# Altium PCB pcbMapaSensorChassi.PcbDoc
Units mm, origin at the board's own origin, x right, y up, seen from the top; angles counter-clockwise.
Board outline 93.5 x 57.5 mm, 2 copper layers (Top Layer, Bottom Layer); 26 components, 31 nets, 128 pads, 19 vias.
Unrouted connection lines stored in the file: 23.
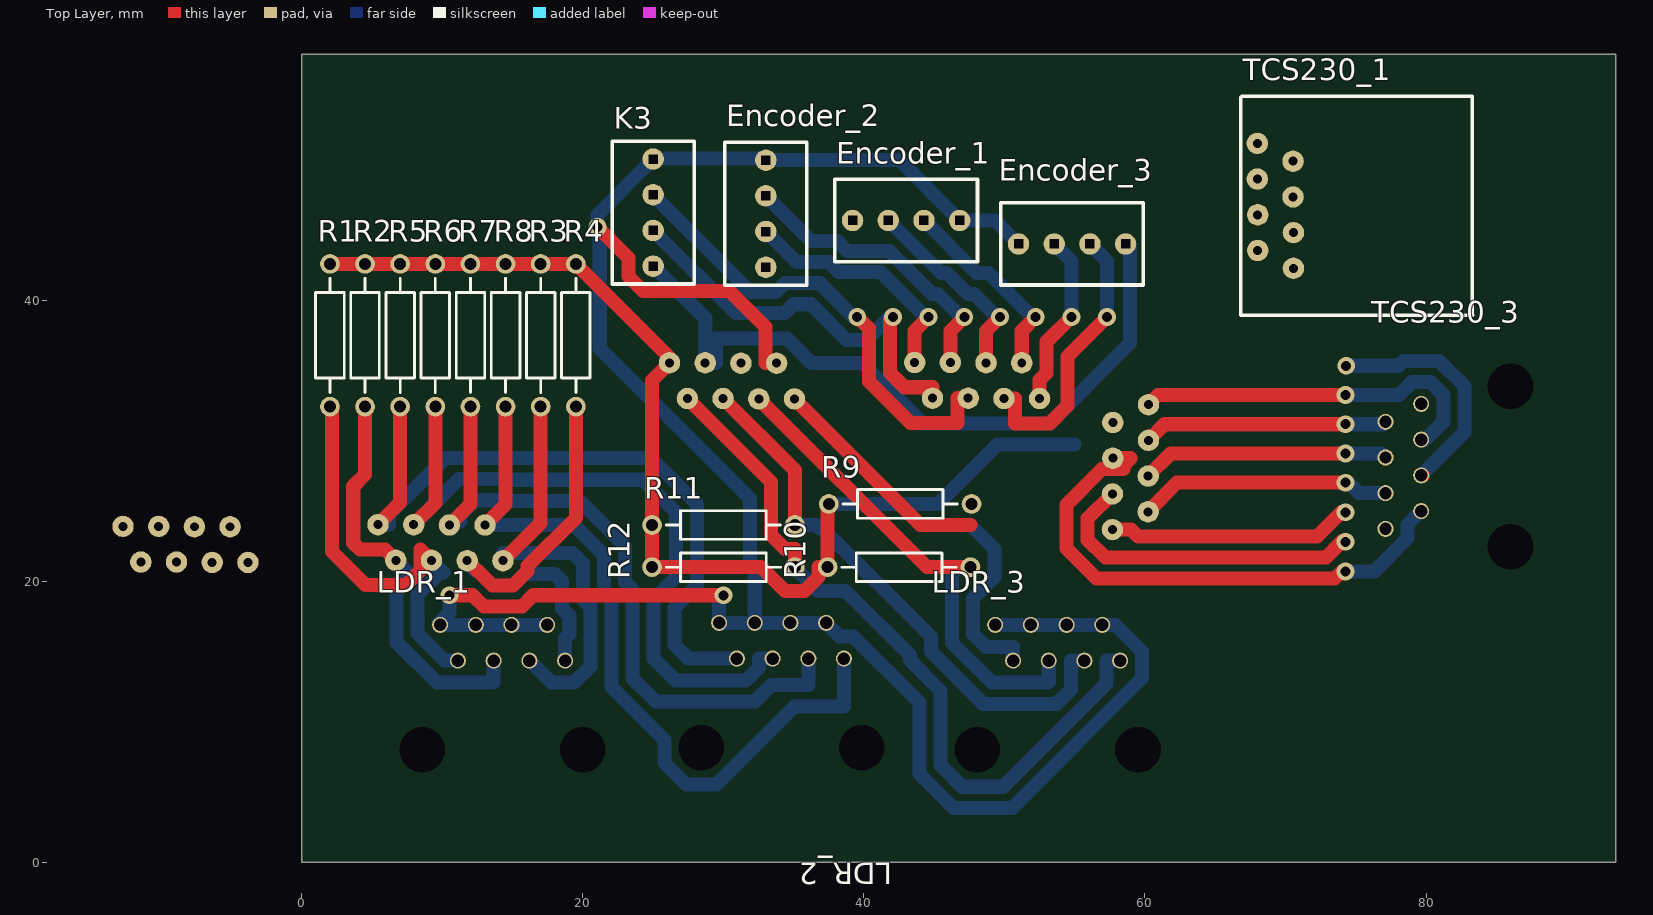
[diagram p0: Top Layer view]
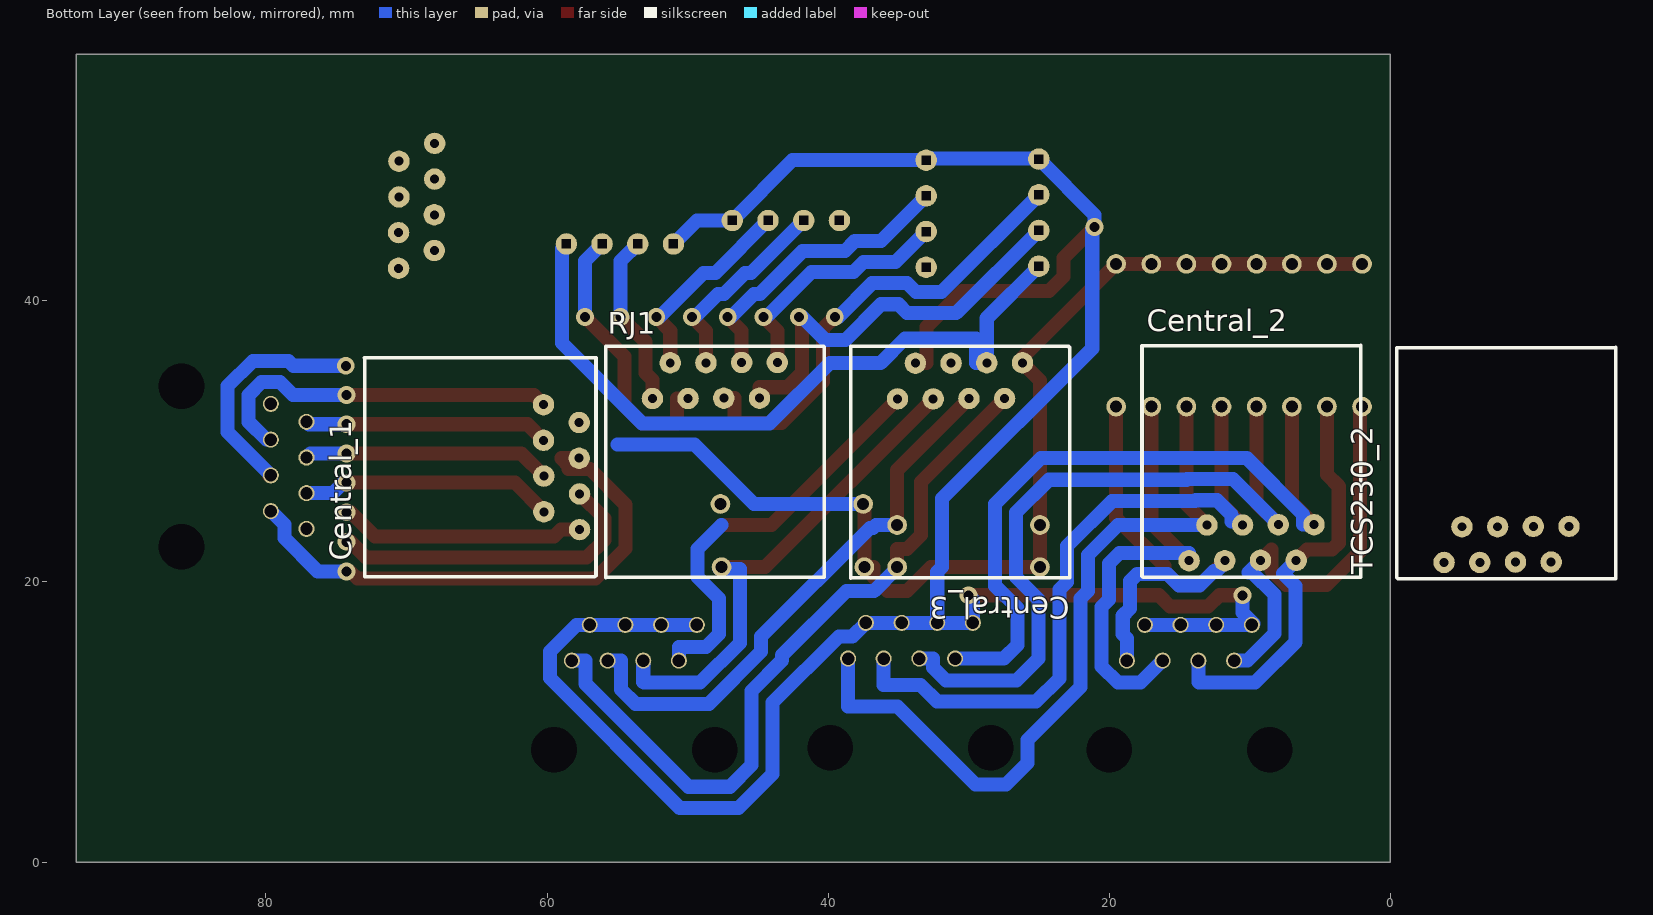
[diagram p1: Bottom Layer view, seen from below]
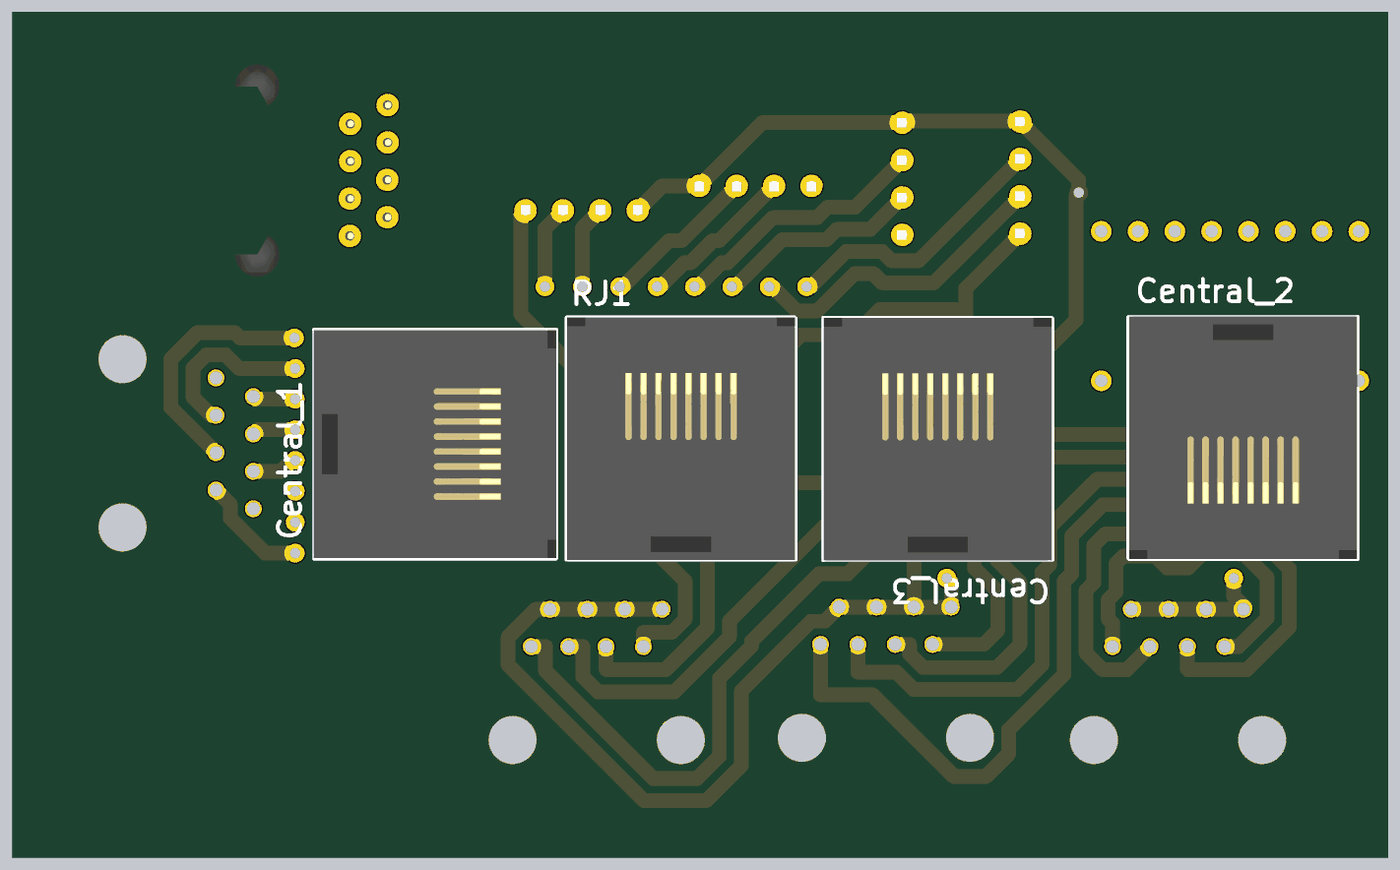
[diagram p2: 3D render of the assembled board from below, using the file's embedded part models]

## Layer stack, top to bottom
Top Solder: solder mask 0.0102, Solder Resist, Dk 3.5
Top Layer: signal copper 0.0356
Dielectric 1: dielectric 0.32, FR-4, Dk 4.8
Bottom Layer: signal copper 0.0356
Bottom Solder: solder mask 0.0102, Solder Resist, Dk 3.5

## Board outline
0,0 93.5,0 93.5,57.5 0,57.5

## Design rules (kind name [scope] priority, off if disabled: settings)
Clearance [All] p1: gap=0.5 ignorepadtopadclearanceinfootprint=FALSE
PolygonConnect [All] p1: connectstyle=Relief reliefconductorwidth=0.254 reliefentries=4 polygonreliefangle="90 Angle" airgapwidth=0.254
RoomDefinition Open_sch [InComponentClass('Open_sch')] p1: confinementstyle=ConfineIn formatcopy=TRUE lockcomponents=FALSE outline 0,0 4,0 4,5.5 0,5.5
RoutingVias [All] p1: holewidth=0.711 width=1.27 viastyle="Through Hole" minholewidth=0.64 minwidth=1.27 maxholewidth=1 maxwidth=1.5
SolderMaskExpansion [All] p1: expansion=0.102
Width [All] p1: maxlimit=3 minlimit=0.5 preferedwidth=1 minimp=50.000000 maximp=50.000000 favimp=50.000000
30 further rules are at their usual default settings.

## Classes and differential pairs
component class Open_sch: Central_2 Central_3 Encoder_1 Encoder_2 Encoder_3 K3 LDR_1 LDR_2 LDR_3 R1 R2 R3 R4 R5 R6 R7 R8 R9 R10 R11 R12 TCS230_2 TCS230_3

## Components (designator, comment, footprint, x,y, rotation, side; value= is the part's Value field where it differs from the comment)
Central_1 "RJ45" RJ45_90#1 60.249,32.563 r270 bottom
Central_2 "RJ45" RJ45_90#1 5.42,24.025 r0 bottom
Central_3 "RJ45" RJ45_90#1 35.056,32.975 r180 bottom
Encoder_1 "Encoder1" 4-vias 39.192,45.669 r90 top
Encoder_2 "Encoder_2" 4-vias 33.02,42.342 r180 top
Encoder_3 "Encoder_3" 4-vias 58.62,44 r270 top
K3 "Encoder_4" 4-vias 25,42.42 r180 top
LDR_1 "RJ45" RJ45_Simples 8.57,8 r0 top
LDR_2 "RJ45" RJ45_Simples 28.42,8.15 r0 top
LDR_3 "RJ45" RJ45_Simples 48.07,8 r0 top
R1 "Res2" AXIAL-0.4 2,37.5 r90 top value=1K
R2 "Res2" AXIAL-0.4 4.5,37.5 r90 top value=1K
R3 "Res2" AXIAL-0.4 17,37.5 r90 top value=1K
R4 "Res2" AXIAL-0.4 19.5,37.5 r90 top value=1K
R5 "Res2" AXIAL-0.4 7,37.5 r90 top value=1K
R6 "Res2" AXIAL-0.4 9.5,37.5 r90 top value=1K
R7 "Res2" AXIAL-0.4 12,37.5 r90 top value=1K
R8 "Res2" AXIAL-0.4 14.5,37.5 r90 top value=1K
R9 "Res2" AXIAL-0.4 42.58,25.5 r180 top value=1K
R10 "Res2" AXIAL-0.4 42.5,21 r180 top value=1K
R11 "Res2" AXIAL-0.4 30,24 r180 top value=1K
R12 "Res2" AXIAL-0.4 30,21 r180 top value=1K
RJ1 "RJ45" RJ45_90#1 52.5,33 r180 bottom
TCS230_1 "RJ45" RJ45_90#1 70.561,42.266 r90 top
TCS230_2 "RJ45" RJ45_90#2 -12.725,23.901 r0 bottom
TCS230_3 "RJ45" RJ45_Simples 86.004,22.454 r90 top

## Footprints (in the part's own frame and the unit in brackets; to place one, negate y for a bottom-side part, rotate by r counter-clockwise, add the part's x,y. Pads: shape width x height; smd on the part's side, far side on the other; paste and mask are expansions set on the pad)
4-vias [mil]
  round 60 hole 25.2 square: 1(0,0) 2(0,-100) 3(0,-200) 4(0,-300)
  silkscreen extent -115,-350 115,50, body extent -115,-350 115,50, height 460
AXIAL-0.4 [mm] "Axial Device, Thru-Hole; 2 Leads; 0.4 in Pin Spacing"
  round 1.4 hole 0.85: 1(-5.08,0) 2(5.08,0)
  silkscreen extent -4.06,-1.02 4.06,1.02
RJ45_90#1 [mil]
  round 60 hole 25.2: 1(50,100) 2(150,100) 3(250,101) 4(350,101) 5(0,0) 6(100,0) 7(200,1) 8(300,1)
  silkscreen extent -131,-502 482,147, body extent -130,-503 480,147, height 630
RJ45_90#2 [mil]
  round 60 hole 25.2: 1(300,1) 2(350,101) 3(200,1) 4(250,101) 5(100,0) 6(150,100) 7(0,0) 8(50,100)
  silkscreen extent -131,-502 482,147, body extent -130,-503 480,147, height 630
RJ45_Simples [mil] "Sem led nessas porra - 8P8C"
  round 0 hole 128: 0(0,0) 0(450,0)
  round 45 hole 35: 1(400,250) 2(350,350) 3(300,250) 4(250,350) 5(200,250) 6(150,350) 7(100,250) 8(50,350)
  body extent -133,-260 583,395, height 650

## Part data
Encoder_1 Encoder_2 Encoder_3 K3: library part KK4Vias, ComponentLink1Description=Fabricante, ComponentLink1URL=https://www.molex.com/molex/products/family?key=kk_254_rpc_connector_system&channel=products&chanName=family&pageTitle=Introduction&parentKey=kk_interconnect_solutions
R1 R2 R3 R4 R5 R6 R7 R8 R9 R10 R11 R12: "Resistor", LatestRevisionDate=17-Jul-2002, LatestRevisionNote="Re-released for DXP Platform.", PackageDescription="Axial Device, Thru-Hole; 2 Leads; 0.4 in Pin Spacing", PackageReference=AXIAL-0.4, Published=8-Jun-2000, Publisher="Altium Limited"

## Via types
v1: diameter 1.27, hole 0.711, Top Layer to Bottom Layer, 18 vias
v2: diameter 1.27/1.27 (per signal layer), hole 0.711, Top Layer to Bottom Layer, 1 vias

## Nets (pads, with @x,y where several pads share a name; then routed paths per layer and width w, separated by ;. In a path a pad name is that pad's centre, name@x,y a point inside that pad or via, vN(x,y) a via of type N, cw(c..) or ccw(c..) an arc to the next point about the centre after c; other vN are vias at no path point)
3.3V: Central_3.3 Encoder_1.1 Encoder_2.1 Encoder_3.1 K3.1 | length 52.4
  Bottom Layer w1: K3.1 28.706,38.714 Central_3.3 29.484,35.54 29.484,37.277 34.516,37.277 36.253,35.54 39.874,35.54 44.176,31.238 53.23,31.238 58.937,36.946 58.937,43.683 Encoder_3.1
5VCC: Central_3.4 R1.2 R2.2 R3.2 R4.2 R5.2 R6.2 R7.2 R8.2 R9.2 R10.2 R11.2 R12.2 TCS230_1.1 TCS230_2.1 TCS230_3.1 | length 79.9
  Top Layer w1: R1.2 R2.2 R5.2 ; R5.2@7.58,42.58 R6.2 R7.2 R8.2 R3.2 R4.2 26.166,35.914 Central_3.4 24.92,34.294 R11.2 R12.2 32.676,21 34.376,19.3 35.784,19.3 36.78,20.296 36.78,21 R10.2 37.42,25.42 R9.2
  Bottom Layer w1: R9.2 45.256,25.5 49.494,29.738 54.976,29.738
GND: Central_3.1 Encoder_1.4 Encoder_2.4 Encoder_3.4 K3.4 LDR_1.2 LDR_1.4 LDR_1.6 LDR_1.8 LDR_2.2 LDR_2.4 LDR_2.6 LDR_2.8 LDR_3.2 LDR_3.4 LDR_3.6 LDR_3.8 TCS230_1.8 TCS230_2.8 TCS230_3.8 | length 174.8
  Top Layer w1: v1(10.5,19) 12.157,19 12.959,18.198 15.661,18.198 16.463,19 v1(30,19) ; v2(21.031,45.212) 23.238,43.005 23.238,41.69 24.27,40.658 30.428,40.658 33.008,38.077 33.008,35.515 Central_3.1 Central_3.1@33.786,35.666
  Bottom Layer w1: v1(10.5,19) 10.5,17.77 9.73,17 LDR_1.8 LDR_1.6 LDR_1.4 LDR_1.2 ; v1(30,19) 29.69,18.69 LDR_2.8 LDR_2.6 ; LDR_3.8 LDR_3.6 LDR_3.4 LDR_3.2 57.912,16.89 59.802,15.001 59.802,13.122 50.554,3.874 46.361,3.874 43.944,6.291 43.944,11.358 39.231,16.072 38.278,16.072 LDR_2.2 LDR_2.4 LDR_2.6 ; Encoder_3.4 49.331,45.669 Encoder_1.4 42.52,49.962 Encoder_2.4 32.902,50.08 25.04,50.08 K3.4 21.031,46.071 v2(21.031,45.212) 21.2,45.043 21.2,36.56 31.88,25.88 31.88,20.999 32.23,20.649 LDR_2.6
NetCentral_1_1: Central_1.1 TCS230_1.5 TCS230_2.5 TCS230_3.5 | length 17
  Top Layer w1: TCS230_3.5 TCS230_3.5@79.781,27.534
  Bottom Layer w1: v1(74.32,35.331) 78.028,35.331 78.382,35.685 80.927,35.685 82.726,33.886 82.726,30.605 TCS230_3.5
NetCentral_1_2: Central_1.2 TCS230_3.7 | length 39.1
  Top Layer w1: Central_1.2 58.971,28.753 58.971,28.722 58.461,28.213 58.461,27.975 56.954,27.975 54.421,25.443 54.421,22.322 56.562,20.181 73.49,20.181 74.01,20.701 v1(74.27,20.701)
  Bottom Layer w1: v1(74.27,20.701) 76.314,20.701 78.686,23.073 78.686,24.025 TCS230_3.7
NetCentral_1_3: Central_1.3 TCS230_2.7 | length 23.4
  Top Layer w1: Central_1.3 55.921,24.451 55.921,22.943 57.184,21.681 72.868,21.681 74.038,22.85 v1@74.27,22.85
  other v1: 74.27,22.804
NetCentral_1_4: Central_1.4 TCS230_1.7 | length 17.5
  Top Layer w1: Central_1.4 59.002,23.673 59.494,23.181 72.247,23.181 73.996,24.93 v1@74.27,24.93
  other v1: 74.27,24.907
NetCentral_1_5: Central_1.5 TCS230_1.3 TCS230_2.3 TCS230_3.3 | length 26.1
  Top Layer w1: Central_1.5 60.937,33.251 v1(74.27,33.251)
  Bottom Layer w1: v1(74.27,33.251) 78.07,33.251 79.003,34.185 80.305,34.185 81.226,33.265 81.226,31.34 79.959,30.074 TCS230_3.3
NetCentral_1_6: Central_1.6 TCS230_1.2 TCS230_2.2 TCS230_3.2 | length 17.4
  Top Layer w1: Central_1.6 61.397,31.171 v1(74.27,31.171)
  Bottom Layer w1: v1(74.27,31.171) 76.942,31.171 TCS230_3.2
NetCentral_1_7: Central_1.7 TCS230_1.4 TCS230_2.4 TCS230_3.4 | length 17.7
  Top Layer w1: Central_1.7 61.831,29.091 v1(74.27,29.091)
  Bottom Layer w1: v1(74.27,29.091) 76.827,29.091 TCS230_3.4
NetCentral_1_8: Central_1.8 TCS230_1.6 TCS230_2.6 TCS230_3.6 | length 18.1
  Top Layer w1: Central_1.8 62.291,27.011 v1(74.27,27.011)
  Bottom Layer w1: v1(74.27,27.011) 74.479,27.011 75.226,26.264 TCS230_3.6
NetCentral_2_1: Central_2.1 LDR_1.5 R2.1 | length 30.1
  Top Layer w1: R2.1 4.5,27.597 3.658,26.755 3.658,22.733 4.127,22.263 5.912,22.263 Central_2.1
  Bottom Layer w1: Central_2.1@6.69,21.223 Central_2.1 7.621,20.554 6.73,19.664 6.73,15.656 9.608,12.779 13.594,12.779 13.65,12.835 LDR_1.5
NetCentral_2_2: Central_2.2 LDR_1.7 R1.1 | length 30.9
  Top Layer w1: R1.1 2.158,32.262 2.158,22.111 4.546,19.723 7.42,19.723 8.452,20.756 8.452,22.263 Central_2.2
  Bottom Layer w1: Central_2.2@9.182,21.485 Central_2.2 10.08,20.635 9.823,20.635 8.23,19.042 8.23,16.278 10.158,14.35 LDR_1.7
NetCentral_2_3: Central_2.3 LDR_1.1 R4.1 | length 32.7
  Top Layer w1: Central_2.3 12.5,20.73 12.548,20.73 13.58,19.698 15.04,19.698 16.072,20.73 16.072,21.072 19.5,24.5 R4.1
  Bottom Layer w1: Central_2.3 11.77,21.31 12.35,20.73 12.548,20.73 13.58,19.698 15.04,19.698 15.842,20.5 18,20.5 18.5,20 18.5,18.072 19.031,17.541 19.031,16.239 18.73,15.938 LDR_1.1
NetCentral_2_4: Central_2.4 LDR_1.3 R3.1 | length 31.6
  Top Layer w1: Central_2.4 17,24.15 R3.1
  Bottom Layer w1: Central_2.4 14.31,22 19.257,22 20,21.257 20,18.694 20.531,18.162 20.531,13.929 19.381,12.779 17.761,12.779 LDR_1.3
NetCentral_2_5: Central_2.5 LDR_2.7 R5.1 | length 51
  Top Layer w1: Central_2.5 7,25.605 R5.1
  Bottom Layer w1: Central_2.5 6.198,24.025 6.198,24.755 10.205,28.762 24.859,28.762 28.12,25.501 28.12,19.675 26.531,18.086 26.531,15.469 27.5,14.5 LDR_2.7
NetCentral_2_6: Central_2.6 LDR_2.5 R6.1 | length 51.2
  Top Layer w1: Central_2.6 9.5,25.565 R6.1
  Bottom Layer w1: Central_2.6 11.197,27.262 14.458,27.262 14.5,27.22 24.28,27.22 26.62,24.88 26.62,20.296 25.031,18.707 25.031,14.5 26.603,12.929 31.611,12.929 32.531,13.849 32.531,14.5 LDR_2.5
NetCentral_2_7: Central_2.7 LDR_2.3 R7.1 | length 49.1
  Top Layer w1: Central_2.7 12,25.5 R7.1
  Bottom Layer w1: Central_2.7 10.762,24.262 11.278,24.262 11.278,24.73 12.31,25.762 13.837,25.762 13.879,25.72 19.78,25.72 23,22.5 23,19.936 23.531,19.405 23.531,13.09 25.193,11.429 32.232,11.429 33.424,12.62 36.04,12.62 LDR_2.3
NetCentral_2_8: Central_2.8 LDR_2.1 R8.1 | length 54.1
  Top Layer w1: Central_2.8 14.5,25.46 R8.1
  Bottom Layer w1: Central_2.8 19.379,24 21.5,21.879 21.5,19.315 22.031,18.784 22.031,12.469 25.794,8.706 25.794,7.062 27.332,5.524 29.508,5.524 35.063,11.08 38.58,11.08 LDR_2.1
NetCentral_3_5: Central_3.5 LDR_3.7 R9.1 | length 29.5
  Top Layer w1: Central_3.5 44.031,24 47.58,24
  Bottom Layer w1: 47.58,24 49.28,22.3 49.28,20.296 47.768,18.784 47.768,16.239 48.689,15.319 50.61,15.319 LDR_3.7
NetCentral_3_6: Central_3.6 LDR_3.5 R10.1 | length 36.5
  Top Layer w1: Central_3.6 44.491,21 R10.1
  Bottom Layer w1: R10.1 47.721,20.859 46.269,20.859 46.269,15.618 49.108,12.779 53.094,12.779 53.15,12.835 LDR_3.5
NetCentral_3_7: Central_3.7 LDR_3.3 R11.1 | length 40.2
  Top Layer w1: Central_3.7 35.08,27.896 R11.1
  Bottom Layer w1: R11.1@35.08,24.064 R11.1 36.596,24 36.796,23.8 37.024,23.8 44.769,16.056 44.769,14.996 48.486,11.279 53.715,11.279 54.722,12.285 54.722,14.35 LDR_3.3
NetCentral_3_8: Central_3.8 LDR_3.1 R12.1 | length 53.2
  Top Layer w1: Central_3.8 33.38,27.056 33.38,23.296 34.376,22.3 35.08,22.3 R12.1
  Bottom Layer w1: R12.1 35.08,20.936 36.716,19.3 38.7,19.3 43.269,14.731 43.269,14.375 45.444,12.199 45.444,6.912 46.982,5.374 49.932,5.374 57.262,12.704 57.262,14.35 LDR_3.1
NetEncoder_1_2: Encoder_1.2 RJ1.2 | length 14.5
  Top Layer w1: RJ1.2 48.69,37.819 v1(49.682,38.811)
  Bottom Layer w1: Encoder_1.2 41.759,45.669 45.482,41.946 45.901,41.946 47.401,40.446 47.82,40.446 49.455,38.811 v1(49.682,38.811)
NetEncoder_1_3: Encoder_1.3 RJ1.1 | length 14.5
  Top Layer w1: RJ1.1 51.23,37.819 v1(52.222,38.811)
  Bottom Layer w1: Encoder_1.3 44.299,45.669 48.022,41.946 48.86,41.946 51.995,38.811 v1(52.222,38.811)
NetEncoder_2_2: Encoder_2.2 RJ1.4 | length 17.8
  Top Layer w1: RJ1.4 43.61,37.819 v1(44.602,38.811)
  Bottom Layer w1: Encoder_2.2 35.192,42.71 37.48,42.71 38.186,42.004 41.182,42.004 44.375,38.811 v1(44.602,38.811)
NetEncoder_2_3: Encoder_2.3 RJ1.3 | length 21.3
  Top Layer w1: RJ1.3 46.15,37.819 v1(47.142,38.811)
  Bottom Layer w1: Encoder_2.3 36.232,44.21 38.101,44.21 38.807,43.504 41.804,43.504 44.861,40.446 45.28,40.446 46.915,38.811 v1(47.142,38.811)
NetEncoder_3_2: Encoder_3.2 RJ1.6 | length 20
  Top Layer w1: RJ1.6 50.738,33 50.738,31.238 53.23,31.238 54.492,32.5 54.492,36.001 v1(57.302,38.811)
  Bottom Layer w1: Encoder_3.2 57.302,42.778 v1(57.302,38.811)
NetEncoder_3_3: Encoder_3.3 RJ1.5 | length 12.4
  Top Layer w1: RJ1.5 52.5,34.318 52.992,34.81 52.992,37.041 v1(54.762,38.811)
  Bottom Layer w1: Encoder_3.3 54.762,42.778 v1(54.762,38.811)
NetK3_2: K3.2 RJ1.8 | length 29.8
  Top Layer w1: v1(42.062,38.811) 41.848,38.597 41.848,34.836 42.88,33.803 44.88,33.803 RJ1.8
  Bottom Layer w1: K3.2 30.88,39.08 34.371,39.08 35.001,39.71 36.237,39.71 38.771,37.176 40.2,37.176 41.835,38.811 v1(42.062,38.811)
NetK3_3: K3.3 RJ1.7 | length 33.6
  Top Layer w1: v1(39.522,38.811) 40.348,37.986 40.348,34.214 43.299,31.263 46.642,31.263 46.642,33.025 RJ1.7
  Bottom Layer w1: K3.3 31.92,40.58 33.75,40.58 34.38,41.21 36.859,41.21 39.257,38.811 v1(39.522,38.811)
pads on no net: Central_3.2 LDR_1.0 LDR_2.0 LDR_3.0 TCS230_3.0